# EAGLE board ScanDriver (EAGLE 6.3)
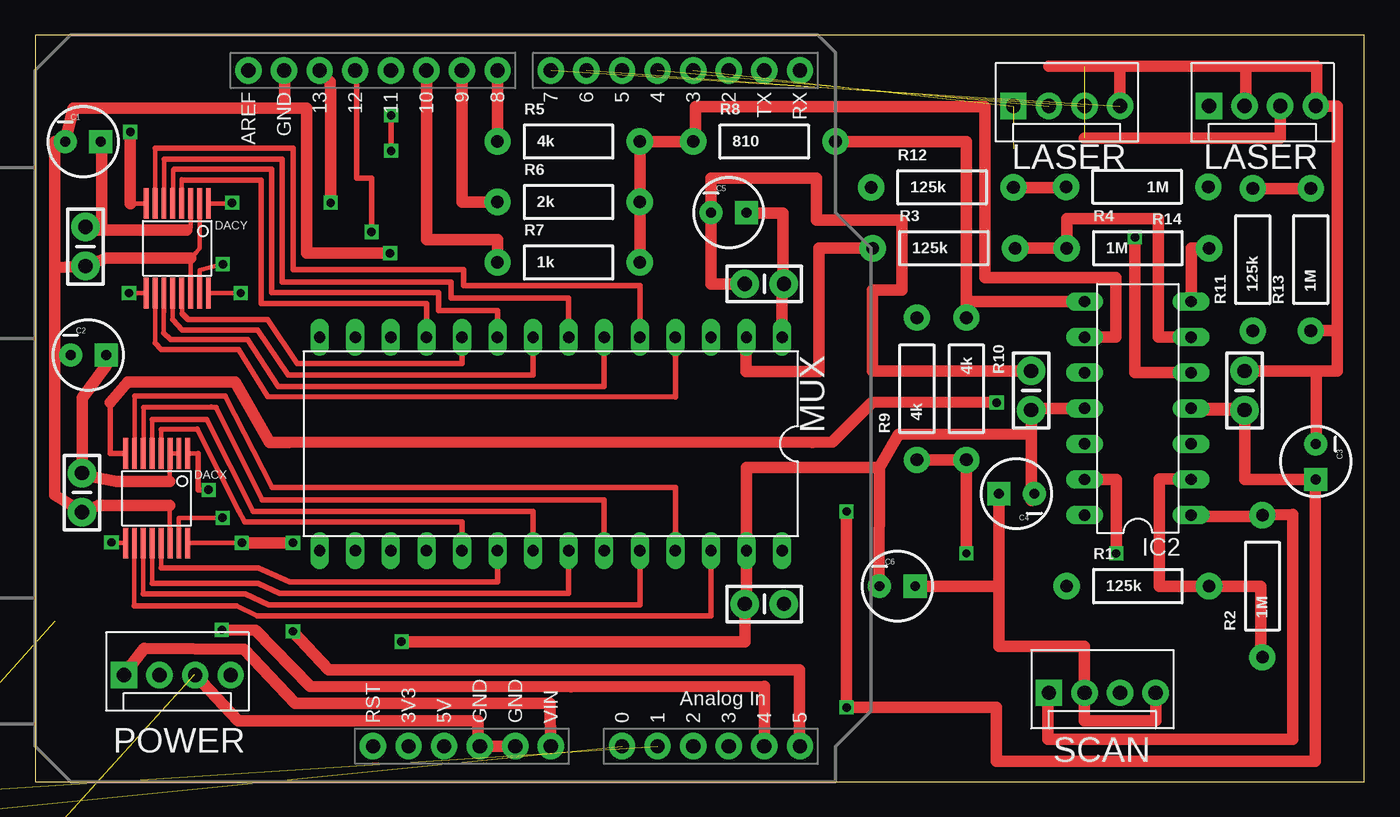
[diagram p0: board, top side]
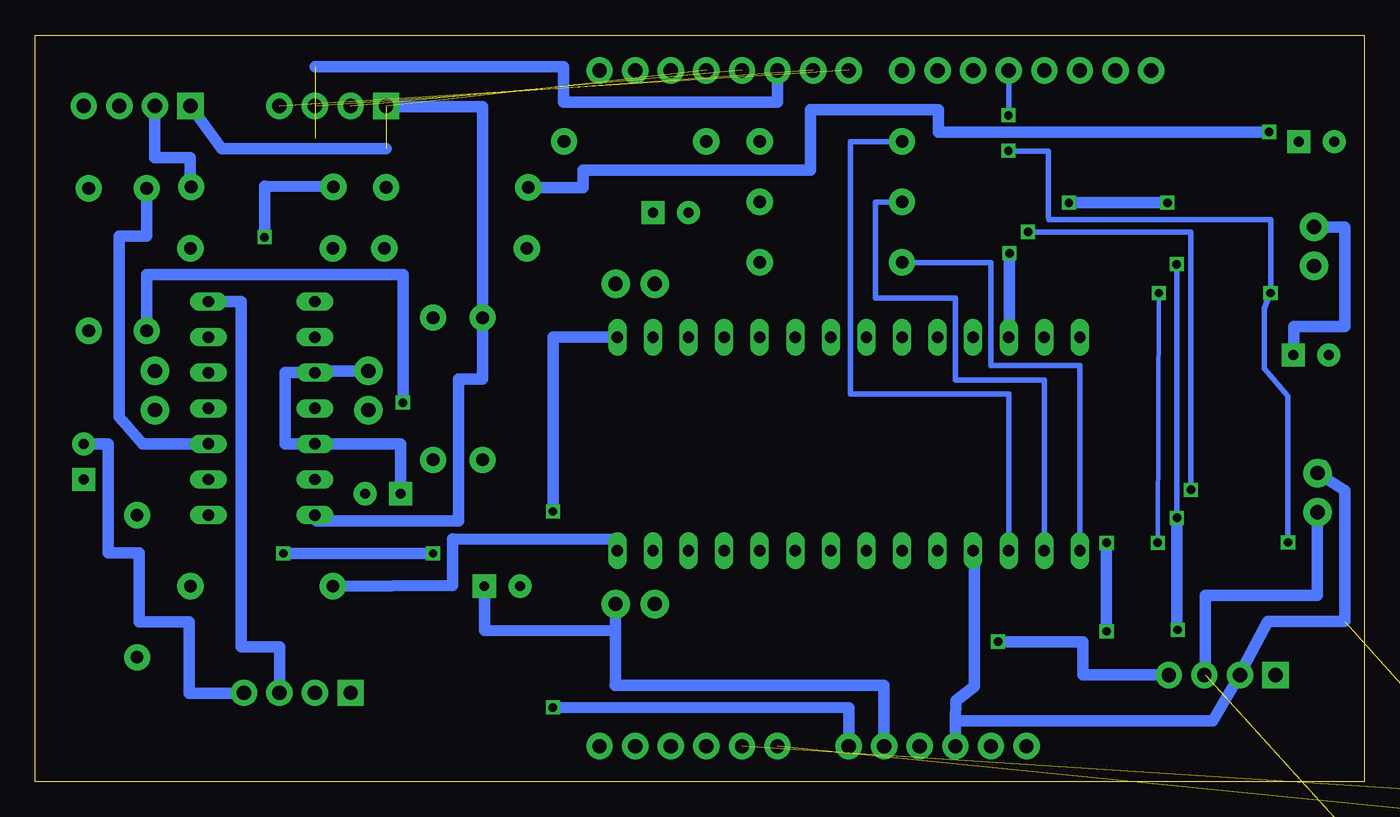
[diagram p1: board, bottom side, seen from below]

Size 94.92 x 53.33 mm. Coordinates in mm from the lower left corner, seen from the top.
Outline: 0,0 94.92,0 94.92,53.33 0,53.33 0,0
Copper layers (1*16): Top 0.035mm / dielectric 1.5mm / Bottom 0.035mm
Design rules "default *": minimum track width 10mil, minimum drill 20mil, track to track 8mil, track to pad 8mil, pad to pad 8mil, via to via 8mil, smd to smd 8mil, copper to edge 40mil, drill to drill 8mil, minimum pad ring 10mil, minimum via ring 8mil, stop-mask expansion 4mil, vias tented up to drill 0mil, thermal gap 10mil

## Footprints (pad centres in the part's own frame; a part is rotated, then mirrored left to right if it is on the bottom)
CPOL-RADIAL-10UF-25V = drill 0.7 pad 1.651 square: 1 1.27,0 | drill 0.7 pad 1.651: 2 -1.27,0
CAP-PTH-SMALL-KIT = drill 1.016 pad 2.032: 1 -1.397,0; 2 1.397,0
SSOP16 = smd 0.35 x 2.2: P$1 -2.223,-3.2; P$2 -1.587,-3.2; P$3 -0.953,-3.2; P$4 -0.318,-3.2; P$5 0.318,-3.2; P$6 0.953,-3.2; P$7 1.587,-3.2; P$8 2.223,-3.2; P$9 2.223,3.2; P$10 1.587,3.2; P$11 0.953,3.2; P$12 0.318,3.2; P$13 -0.318,3.2; P$14 -0.953,3.2; P$15 -1.587,3.2; P$16 -2.223,3.2
DIL14 = drill 0.813 long: 1 -7.62,-3.81; 2 -5.08,-3.81; 3 -2.54,-3.81; 4 0,-3.81; 5 2.54,-3.81; 6 5.08,-3.81; 7 7.62,-3.81; 8 7.62,3.81; 9 5.08,3.81; 10 2.54,3.81; 11 0,3.81; 12 -2.54,3.81; 13 -5.08,3.81; 14 -7.62,3.81
MOLEX-1X4 = drill 1.016 pad 1.88 square: 1 0,0 | drill 1.016 pad 1.88: 2 2.54,0; 3 5.08,0; 4 7.62,0
DIL28-6 = drill 0.813 long: 1 -16.51,-7.62; 2 -13.97,-7.62; 3 -11.43,-7.62; 4 -8.89,-7.62; 5 -6.35,-7.62; 6 -3.81,-7.62; 7 -1.27,-7.62; 8 1.27,-7.62; 9 3.81,-7.62; 10 6.35,-7.62; 11 8.89,-7.62; 12 11.43,-7.62; 13 13.97,-7.62; 14 16.51,-7.62; 15 16.51,7.62; 16 13.97,7.62; 17 11.43,7.62; 18 8.89,7.62; 19 6.35,7.62; 20 3.81,7.62; 21 1.27,7.62; 22 -1.27,7.62; 23 -3.81,7.62; 24 -6.35,7.62; 25 -8.89,7.62; 26 -11.43,7.62; 27 -13.97,7.62; 28 -16.51,7.62
TO92 = drill 0.813 octagon: 1 1.27,0; 2 0,1.905; 3 -1.27,0
AXIAL-0.4 = drill 0.9 pad 1.88: P$1 -5.08,0; P$2 5.08,0
DUEMILANOVE_SHIELD_NOHOLES = drill 1.016 pad 1.88: 3.3V 50.8,26.67; 5V 50.8,29.21; A0 50.8,41.91; A1 50.8,44.45; A2 50.8,46.99; A3 50.8,49.53; A4 50.8,52.07; A5 50.8,54.61; AREF 2.54,15.24; D2 2.54,49.53; D3 2.54,46.99; D4 2.54,44.45; D5 2.54,41.91; D6 2.54,39.37; D7 2.54,36.83; D8 2.54,33.02; D9 2.54,30.48; D10 2.54,27.94; D11 2.54,25.4; D12 2.54,22.86; D13 2.54,20.32; GND@0 50.8,31.75; GND@1 50.8,34.29; GND@2 2.54,17.78; RES 50.8,24.13; RX 2.54,54.61; TX 2.54,52.07; VIN 50.8,36.83

## Placement (x,y rotation side)
C1  10uF  [CPOL-RADIAL-10UF-25V]  3.43,45.72 0 top
C2  10uF  [CPOL-RADIAL-10UF-25V]  3.81,30.48 0 top
C3  10uF  [CPOL-RADIAL-10UF-25V]  91.44,22.86 270 top
C4  10uF  [CPOL-RADIAL-10UF-25V]  70.08,20.57 180 top
C5  10uF  [CPOL-RADIAL-10UF-25V]  49.53,40.64 0 top
C6  10uF  [CPOL-RADIAL-10UF-25V]  61.57,13.97 0 top
C7  .1uF  [CAP-PTH-SMALL-KIT]  3.35,20.65 90 top
C8  .1uF  [CAP-PTH-SMALL-KIT]  3.61,38.23 90 top
C9  .1uF  [CAP-PTH-SMALL-KIT]  52.07,35.56 0 top
C10  .1uF  [CAP-PTH-SMALL-KIT]  71.12,27.94 270 top
C11  .1uF  [CAP-PTH-SMALL-KIT]  86.36,27.94 270 top
C12  .1uF  [CAP-PTH-SMALL-KIT]  52.07,12.7 180 top
DACX  AD5669R  [SSOP16]  8.69,20.24 180 top
DACY  AD5669R  [SSOP16]  10.16,38.1 180 top
IC2  OPA404P  [DIL14]  78.74,26.67 90 top
JP1  Power  [MOLEX-1X4]  6.35,7.62 0 top
JP2  ScanOut  [MOLEX-1X4]  72.39,6.35 0 top
JP3  LASER  [MOLEX-1X4]  83.82,48.26 0 top
JP4  SYNC  [MOLEX-1X4]  69.85,48.26 0 top
JP5  THERM  [MOLEX-1X4]  -14.27,-12.29 0 top  (outside the outline)
MUX  ADG507A  [DIL28-6]  36.83,24.13 180 top
Q1  2N3904  [TO92]  -12.88,-3.07 0 top  (outside the outline)
R1  125k  [AXIAL-0.4]  78.74,13.97 0 top
R2  1M  [AXIAL-0.4]  87.63,13.97 90 top
R3  125k  [AXIAL-0.4]  64.9,38.1 0 top
R4  1M  [AXIAL-0.4]  78.74,38.1 0 top
R5  4k  [AXIAL-0.4]  38.1,45.72 0 top
R6  2k  [AXIAL-0.4]  38.1,41.4 0 top
R7  1k  [AXIAL-0.4]  38.1,37.08 0 top
R8  810  [AXIAL-0.4]  52.07,45.72 0 top
R9  4k  [AXIAL-0.4]  62.97,28.07 90 top
R10  4k  [AXIAL-0.4]  66.5,28.07 270 top
R11  125k  [AXIAL-0.4]  86.94,37.29 90 top
R12  125k  [AXIAL-0.4]  64.77,42.44 0 top
R13  1M  [AXIAL-0.4]  91.08,37.29 90 top
R14  1M  [AXIAL-0.4]  78.69,42.49 180 top
R15  4.7k  [AXIAL-0.4]  -9.5,-7.87 0 top  (outside the outline)
U1  ARDUINO_SHIELDNOHOLES  [DUEMILANOVE_SHIELD_NOHOLES]  0,53.34 270 top

## Library data of the parts
C1-C12 DACX DACY JP1-JP5 R1-R15 U1 = SparkFun
IC2 = linear
MUX = maxim; MPN: DG507ACJ+; OC_FARNELL: 1077079; OC_NEWARK: 18M9071
Q1 = transistor-npn

## Nets
+5V: C1.1 C2.1 C7.2 C8.2 DACX.P$2 DACX.P$3 DACY.P$3 JP1.2 MUX.18 Q1.1 R15.P$2 U1.5V
+12V: C3.1 C5.1 C9.2 C11.2 IC2.4 JP1.1 MUX.1 U1.VIN
-12V: C4.2 C6.2 C10.2 C12.2 IC2.11 JP1.4 MUX.27
A0: MUX.17 R5.P$1 U1.D8
A1: MUX.16 R6.P$1 U1.D9
A2: MUX.15 R7.P$1 U1.D10
ADDROUT: IC2.14 JP3.1 R9.P$2
CLR: DACX.P$9 DACY.P$9 U1.D11
DACSYNC: JP4.2 U1.D4
GND: C1.2 C2.2 C3.2 C4.1 C5.2 C6.1 C7.1 C8.1 C9.1 C10.1 C11.1 C12.1 DACX.P$14 DACY.P$2 DACY.P$14 IC2.10 IC2.12 JP1.3 JP2.2 JP2.4 JP3.2 JP3.4 JP5.2 JP5.3 JP5.4 MUX.12 R13.P$1 R14.P$1 U1.GND@0 U1.GND@1 U1.GND@2
LASERCMD: JP3.3 U1.D5
N$1: IC2.2 R1.P$2 R2.P$1
N$2: IC2.6 R3.P$2 R4.P$1
N$3: IC2.9 R5.P$2 R6.P$2 R7.P$2 R8.P$1
N$4: IC2.8 R8.P$2 R10.P$1
N$5: IC2.13 R9.P$1 R10.P$2
N$17: IC2.3 R11.P$2 R13.P$2
N$19: IC2.5 R12.P$2 R14.P$2
ONEWIRE: JP5.1 Q1.3 R15.P$1 U1.A0
ONEWIREPULLUP: Q1.2 U1.A1
SCL: DACX.P$16 DACY.P$16 U1.A5
SDA: DACX.P$15 DACY.P$15 U1.A4
SERIALSYNC: JP4.1 U1.D3
SWITCHEDX: MUX.28 R1.P$1
SWITCHEDY: MUX.2 R3.P$1
SYNC1: JP4.3 U1.D6
SYNC2: JP4.4 U1.D7
XLDAC: DACX.P$1 U1.D12
XOUT: IC2.1 JP2.1 R2.P$2
XREF: DACX.P$8 R11.P$1
XVA: DACX.P$4 MUX.19
XVB: DACX.P$13 MUX.20
XVC: DACX.P$5 MUX.21
XVD: DACX.P$12 MUX.22
XVE: DACX.P$6 MUX.23
XVF: DACX.P$11 MUX.24
XVG: DACX.P$7 MUX.25
XVH: DACX.P$10 MUX.26
YLDAC: DACY.P$1 U1.D13
YOUT: IC2.7 JP2.3 R4.P$2
YREF: DACY.P$8 R12.P$1
YVA: DACY.P$4 MUX.11
YVB: DACY.P$13 MUX.10
YVC: DACY.P$5 MUX.9
YVD: DACY.P$12 MUX.8
YVE: DACY.P$6 MUX.7
YVF: DACY.P$11 MUX.6
YVG: DACY.P$7 MUX.5
YVH: DACY.P$10 MUX.4

## Tracks (layer width: path | path; a pad name or v marks a point on that pad's centre or on a via)
+5V  (2 unrouted)
  Top 0.305: DACY.P$3 11.1,39.57 10.85,39.4 | 5.08,39.4 C8.2 | DACX.P$2 DACX.P$3 9.63,23.44 9.63,21.46
  Top 0.813: 10.85,39.4 5.08,39.4 4.78,39.4 | C1.1 4.78,45.72 4.78,39.4 | 9.63,21.46 5.82,21.46 3.38,21.92 | 3.38,21.92 C7.2 | 4.78,39.4 3.63,39.4 3.63,39.57 | 3.38,21.92 3.38,24 3.35,27.41 5.08,29.72 C2.1
  Bottom 0.813: C8.2 3.61,39.6 1.42,39.6 1.42,32.51 5.05,32.51 5.05,30.48 C2.1 | 2.95,22.58 C7.2 1.42,20.8 1.42,11.46 6.91,11.46 8.94,7.62 JP1.2 10.82,4.37 29.21,4.37 | MUX.18 27.86,16.51 27.86,6.81 29.18,5.77 29.21,4.37 | 29.21,4.37 U1.5V
+12V  (via drill 0.6)
  Top 0.813: C3.1 91.42,21.59 | 86.39,21.59 86.36,21.59 C11.2 82.55,26.54 IC2.4 86.39,26.67 86.39,21.59 | U1.VIN 36.8,2.54 36.78,5.59 18.57,5.61 14.94,9.47 7.8,9.53 JP1.1 | MUX.1 53.34,35.56 C9.2 53.39,35.56 53.39,40.62 50.8,40.62 C5.1 | v57.94,19.3 v57.94,5.31 57.91,5.33 68.66,5.33 68.66,1.45 91.39,1.45 91.39,21.57 91.42,21.57 91.42,21.59 | 86.39,21.59 91.42,21.59
  Bottom 0.813: MUX.1 57.94,31.75 v57.94,19.3 | v57.94,5.31 36.8,5.28 36.8,2.56 U1.VIN
-12V  (via drill 0.6)
  Top 0.813: IC2.11 71.12,26.67 C10.2 71.12,24.84 | C4.2 71.12,20.09 71.12,24.84 | C6.2 60.25,13.95 60.27,22.43 | 60.27,22.43 50.8,22.43 MUX.27 50.8,12.7 C12.2 50.67,10.01 v26.16,10.01 | 60.27,22.43 61.65,24.82 71.12,24.84
  Bottom 0.813: JP1.4 20.12,7.62 20.12,9.98 26.14,9.98 v26.16,10.01
A0
  Top 0.813: R5.P$1 U1.D8
  Bottom 0.406: R5.P$1 36.7,45.72 36.7,27.69 25.4,27.69 MUX.17
A1
  Top 0.813: R6.P$1 30.48,41.4 U1.D9
  Bottom 0.406: R6.P$1 34.92,41.4 34.92,34.54 29.21,34.54 29.21,28.7 22.86,28.7 MUX.16
A2
  Top 0.813: R7.P$1 33.02,38.73 27.94,38.73 U1.D10
  Bottom 0.406: R7.P$1 26.67,37.08 26.67,29.72 20.32,29.72 MUX.15
ADDROUT  (1 unrouted)
  Bottom 0.406: IC2.14 74.85,19.05 74.8,18.62
  Bottom 0.813: 74.8,18.62 64.67,18.62 64.67,28.75 62.97,28.75 R9.P$2 62.97,48.21 69.85,48.21 | 69.85,45.21 81.58,45.21 JP3.1
CLR  (via drill 0.6)
  Top 0.305: DACY.P$9 v6.71,34.9 | DACX.P$9 5.23,17.04 5.23,17.09
  Top 0.406: 5.23,17.09 v5.46,17.09 | v25.43,45.06 v25.43,47.6
  Bottom 0.406: 6.68,39.27 6.68,39.09 | 6.68,39.09 v6.71,34.9 6.73,34.95 7.16,33.81 7.16,29.52 5.46,27.56 v5.46,17.09 | v25.43,45.06 25.4,45.06 25.4,45.03 22.55,45.03 22.55,40.41 22.53,40.16 6.68,40.16 6.68,39.09 | v25.43,47.6 25.43,47.62 25.38,48.31 25.4,48.34 U1.D11
DACSYNC  (1 unrouted)
GND  (via drill 0.6)  (3 unrouted)
  Top 0.305: DACY.P$2 11.76,38.1 11.49,37.8 11.11,37.39 DACY.P$14 | DACX.P$14 9.63,17.04 9.63,19.74
  Top 0.813: 11.11,37.39 5.08,37.39 C8.1 1.42,36.7 | U1.GND@2 17.8,50.8 17.8,48.11 | 17.8,48.11 2.72,48.11 C1.2 1.42,45.72 1.42,36.7 | 1.42,36.7 1.42,30.48 C2.2 1.42,30.33 1.42,20.5 C7.1 4.5,19.74 9.63,19.74 | 68.81,13.97 68.81,9.68 74.93,9.68 JP2.2 74.93,4.34 80.01,4.34 JP2.4 | 68.81,13.97 C4.1 | C6.1 68.81,13.97 | C3.2 91.47,24.13 91.47,29.34 | 91.47,29.34 C11.1 | U1.GND@1 U1.GND@0 31.62,2.54 31.65,4.37 14.5,4.37 JP1.3 | C9.1 48.26,35.56 C5.2 48.26,43.1 55.78,43.1 55.78,40.11 61.9,40.11 61.9,35.1 59.79,35.1 59.79,29.34 C10.1 | v25.35,37.74 19.41,37.74 19.41,48.11 17.8,48.11 | JP3.4 91.47,48.26 | JP3.4 91.52,48.26 91.52,51.1 86.44,51.1 | 86.44,51.1 77.44,51.1 | 77.44,51.1 72.39,51.1 | 77.44,48.26 77.44,51.1 | JP3.2 86.44,48.26 86.44,51.1 | 91.47,29.34 92.96,29.34 92.96,32.21 | 92.96,32.21 92.96,48.26 JP3.4 | R13.P$1 92.96,32.21
  Bottom 0.813: C4.1 68.81,24.13 IC2.12 77.06,24.13 77.06,29.21 IC2.10 74.93,29.34 C10.1 | U1.GND@1 34.31,2.54 34.31,6.88 53.47,6.88 | JP1.3 11.35,7.62 11.35,13.31 3.35,13.31 C7.1 | MUX.12 25.35,31.75 v25.35,37.74 | 53.47,10.77 C12.1 | 62.84,13.99 C6.1 62.84,10.79 53.47,10.77 | 53.49,6.88 53.47,6.88 | 53.47,6.88 53.47,10.77 | JP2.4 80.01,6.33 83.92,6.33 83.92,11.4 87.48,11.4 87.48,16.36 89.69,16.36 89.69,24.13 C3.2 | R14.P$1 83.84,42.49 83.84,44.58 86.36,44.58 JP3.2
LASERCMD  (1 unrouted)
  Top 0.813: 88.88,48.26 JP3.3 88.9,45.97 74.93,45.97
  Bottom 0.813: U1.D5 41.91,48.54 57.2,48.54 57.2,51.08 74.93,51.08
N$1
  Top 0.406: R2.P$1 87.53,8.89 | 82.55,21.61 IC2.2
  Top 0.813: 87.53,8.89 87.53,13.97 R1.P$2 80.26,13.97 80.26,21.61 82.55,21.61
N$2
  Top 0.813: R3.P$2 R4.P$1 73.66,40.23 80.21,40.23 80.21,31.75 IC2.6
N$3
  Top 0.813: R7.P$2 R6.P$2 R5.P$2 R8.P$1 47.17,45.72 47.17,48.21 67.82,48.21 67.82,36.02 77.17,36.02 77.17,31.75 IC2.9
N$4
  Top 0.406: 66.5,34.29 R10.P$1
  Top 0.813: IC2.8 66.5,34.29 | R8.P$2 66.5,45.72 R10.P$1
N$5  (via drill 0.6)
  Top 0.813: R9.P$1 R10.P$2 v66.5,16.31 | v77.19,16.31 77.19,21.59 IC2.13
  Bottom 0.813: v66.5,16.31 v77.19,16.31
N$17
  Top 0.813: R13.P$2 R11.P$2
  Bottom 0.813: IC2.3 87.25,24.13 88.9,26.06 88.9,38.96 86.94,38.96 R11.P$2
N$19  (via drill 0.6)
  Top 0.813: R12.P$2 73.61,42.44 R14.P$2 | IC2.5 78.54,29.21 v78.54,38.89
  Bottom 0.813: 73.61,42.52 R14.P$2 78.54,42.55 v78.54,38.89
ONEWIRE  (3 unrouted)
ONEWIREPULLUP  (1 unrouted)
SCL  (via drill 0.6)
  Top 0.305: DACX.P$16 13.21,17.04 v14.76,17.07 | DACY.P$16 v14.68,34.9
  Top 0.813: U1.A5 54.59,2.54 54.59,8 20.98,8 | v14.76,17.07 v18.41,17.07 | 21.01,7.98 20.98,8 | 20.98,8 18.39,10.74 v18.41,10.74
  Bottom 0.305: v14.68,34.9 v14.76,17.07
  Bottom 0.813: v18.41,10.74 v18.41,17.07
SDA  (via drill 0.6)
  Top 0.305: DACY.P$15 11.76,36.55 v13.41,36.96 | DACX.P$15 10.26,18.85 v13.39,18.85
  Top 0.813: U1.A4 52.07,6.81 38.28,6.78 19.63,6.83 15.75,10.82 v13.34,10.85
  Bottom 0.406: v13.39,18.85 13.41,18.85 v13.41,36.96
  Bottom 0.813: v13.34,10.85 13.41,10.79 v13.39,18.85
SERIALSYNC  (1 unrouted)
SWITCHEDX
  Bottom 0.813: MUX.28 53.31,16.51 53.31,17.3 65.1,17.35 65.1,14.02 R1.P$1
SWITCHEDY
  Top 0.813: MUX.2 50.77,31.75 50.77,29.31 55.96,29.31 55.96,38.1 R3.P$1
SYNC1  (1 unrouted)
SYNC2  (1 unrouted)
XLDAC  (via drill 0.6)
  Top 0.305: 11.66,23.44 DACX.P$1 | DACX.P$1
  Top 0.406: U1.D12 22.96,50.8 22.96,43.1 24.03,43.1 v24.03,39.27 | v12.39,20.85 11.66,20.85 11.66,23.44
  Bottom 0.406: v24.03,39.27 12.39,39.27 v12.39,20.85
XOUT
  Top 0.305: R2.P$2 87.63,18.95
  Top 0.813: 87.63,18.95 82.55,18.95 IC2.1 | JP2.1 72.31,6.35 72.31,3.02 89.81,3.02 89.81,19.07 R2.P$2
XREF  (via drill 0.6)
  Top 0.406: DACX.P$8 5.38,23.44 5.38,27.1
  Top 0.813: 5.38,27.1 6.63,28.55 14.3,28.55 16.74,24.23 18.11,24.23 56.95,24.26 | 55.5,24.23 56.95,24.26 | 56.95,24.26 59.77,27.1 68.71,27.13 v68.66,27.08
  Bottom 0.813: R11.P$1 86.94,36.22 68.66,36.22 v68.66,27.08
XVA
  Top 0.305: DACX.P$4 9.02,23.44 9.02,25.17
  Top 0.406: 9.02,25.17 11.58,25.2 14.55,19.36 14.96,18.57 30.48,18.54 MUX.19
XVB
  Top 0.305: DACX.P$13 8.99,15.29
  Top 0.406: 8.99,15.29 15.93,15.29 18.19,14.28 33.02,14.28 MUX.20
XVC
  Top 0.305: DACX.P$5 8.36,23.44 8.36,25.88
  Top 0.406: 8.36,25.88 12.24,25.88 15.57,19.3 35.56,19.3 MUX.21
XVD
  Top 0.305: DACX.P$12 8.36,17.04 8.36,14.17
  Top 0.406: 8.36,14.17 15.93,14.17 17.45,13.46 38.1,13.46 MUX.22
XVE
  Top 0.305: DACX.P$6 7.75,23.44 7.75,26.72
  Top 0.406: 7.75,26.72 12.57,26.75 12.93,26.72 16.23,20.14 40.64,20.14 MUX.23
XVF
  Top 0.305: DACX.P$11 7.72,13.41
  Top 0.406: 7.72,13.41 15.01,13.41 16.69,12.62 43.18,12.62 MUX.24
XVG
  Top 0.305: DACX.P$7 7.11,23.44 7.11,27.56
  Top 0.406: 7.11,27.56 13.59,27.56 16.94,21.01 45.72,21.01 MUX.25
XVH
  Top 0.305: DACX.P$10 7.09,17.04 7.09,12.55
  Top 0.406: 7.09,12.55 14.4,12.55 15.88,11.86 48.26,11.86 MUX.26
YLDAC  (via drill 0.6)
  Top 0.305: DACY.P$1 14.07,41.3 v14.07,41.35
  Top 0.813: U1.D13 21.08,50.01 21.11,49.15 21.11,49.07 v21.11,41.35
  Bottom 0.813: v14.07,41.35 v21.11,41.35 21.16,41.35
YOUT
  Top 0.813: R4.P$2 82.55,38.1 IC2.7
  Bottom 0.813: JP2.3 77.47,9.65 80.21,9.65 80.21,34.29 IC2.7
YREF  (via drill 0.6)
  Top 0.305: DACY.P$8 6.83,41.3 | 6.83,41.3
  Top 0.813: 6.83,41.3 6.81,41.3 v6.81,46.41
  Bottom 0.813: v6.81,46.41 30.4,46.41 30.4,48.01 39.55,48.01 39.55,43.66 55.78,43.66 55.78,42.44 R12.P$1
YVA
  Top 0.305: DACY.P$4 10.46,41.3 10.46,43.03 10.54,42.95 10.54,42.98
  Top 0.406: 10.54,42.98 16.13,42.98 16.13,34.16 27.94,34.16 MUX.11
YVB
  Top 0.305: 10.49,33.43 10.49,33.73 10.46,34.9 DACY.P$13
  Top 0.406: MUX.10 30.48,29.87 18.72,29.87 16.61,32.99 10.92,32.99 10.49,33.43
YVC
  Top 0.305: DACY.P$5 9.86,41.3 9.86,43.71 9.93,43.69 9.93,43.74
  Top 0.406: 9.93,43.74 16.89,43.74 16.89,34.92 28.83,34.92 28.83,33.66 33.02,33.66 MUX.9
YVD
  Top 0.305: DACY.P$12 9.83,32.99
  Top 0.406: MUX.8 35.56,29.03 18.09,29.03 15.9,32.26 10.49,32.26 9.83,32.99
YVE
  Top 0.305: DACY.P$6 9.22,44.48
  Top 0.406: 9.22,44.48 17.65,44.48 17.65,35.69 29.72,35.69 29.72,34.54 38.1,34.54 MUX.7
YVF
  Top 0.305: 9.2,33.5 9.2,34.9 DACY.P$11 9.2,32.05
  Top 0.406: MUX.6 40.64,28.22 17.35,28.22 15.19,31.57 9.68,31.57 9.2,32.05
YVG
  Top 0.305: DACY.P$7 8.59,41.3 8.59,45.24
  Top 0.406: 8.59,45.24 18.41,45.24 18.41,36.58 30.61,36.58 30.61,35.43 43.18,35.43 MUX.5
YVH
  Top 0.305: DACY.P$10 8.59,34.9 8.59,31.32
  Top 0.406: MUX.4 45.72,27.48 16.61,27.51 14.53,30.86 9.02,30.86 8.59,31.32

## Text on the board
tNames: LASER | LASER | POWER | SCAN